# Altium PCB Booster_PA_PREAMP.PcbDoc
Units mm, origin at the board's own origin, x right, y up, seen from the top; angles counter-clockwise.
Board outline 79.75 x 29 mm, 2 copper layers (Top Layer, Bottom Layer), stack 1.071 mm thick; 81 components, 50 nets, 216 pads, 238 vias.
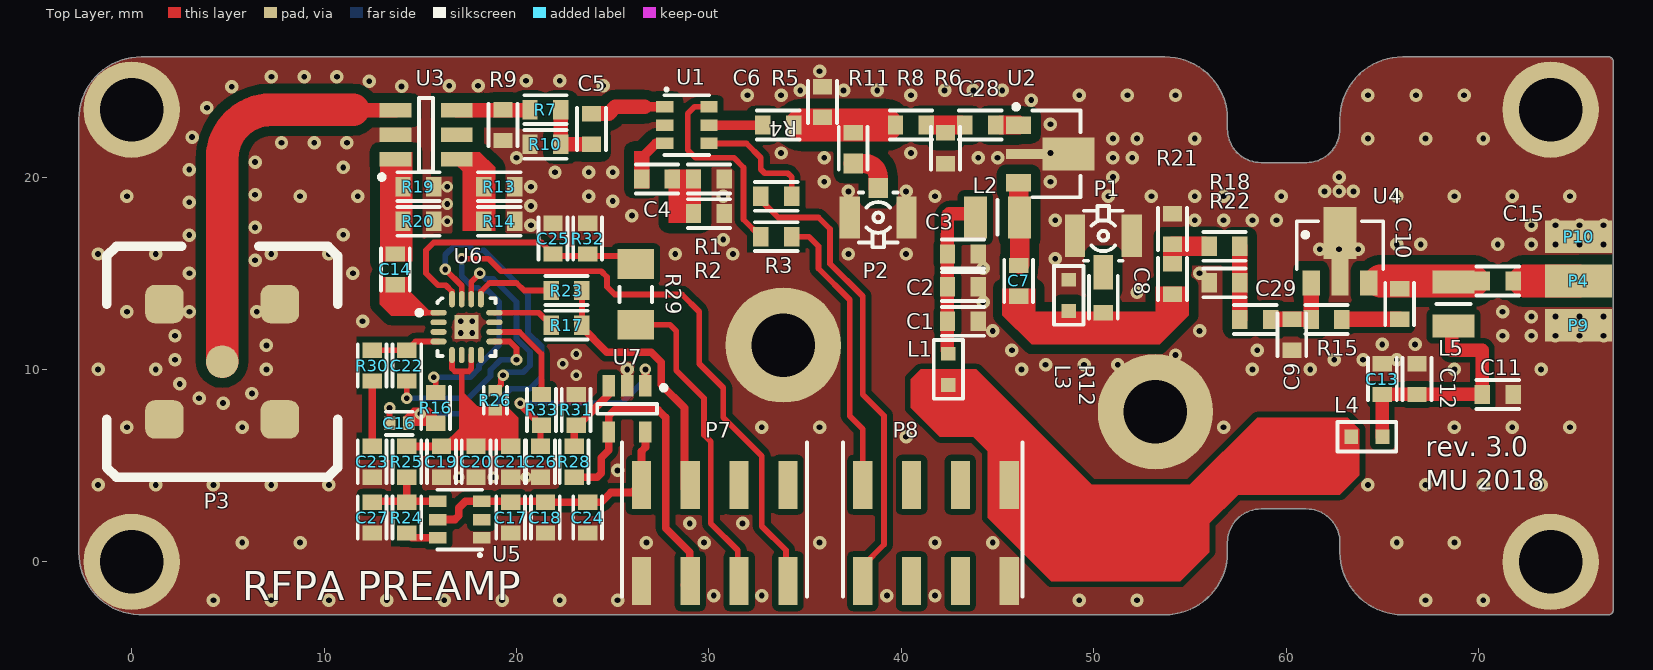
[diagram p0: Top Layer view]
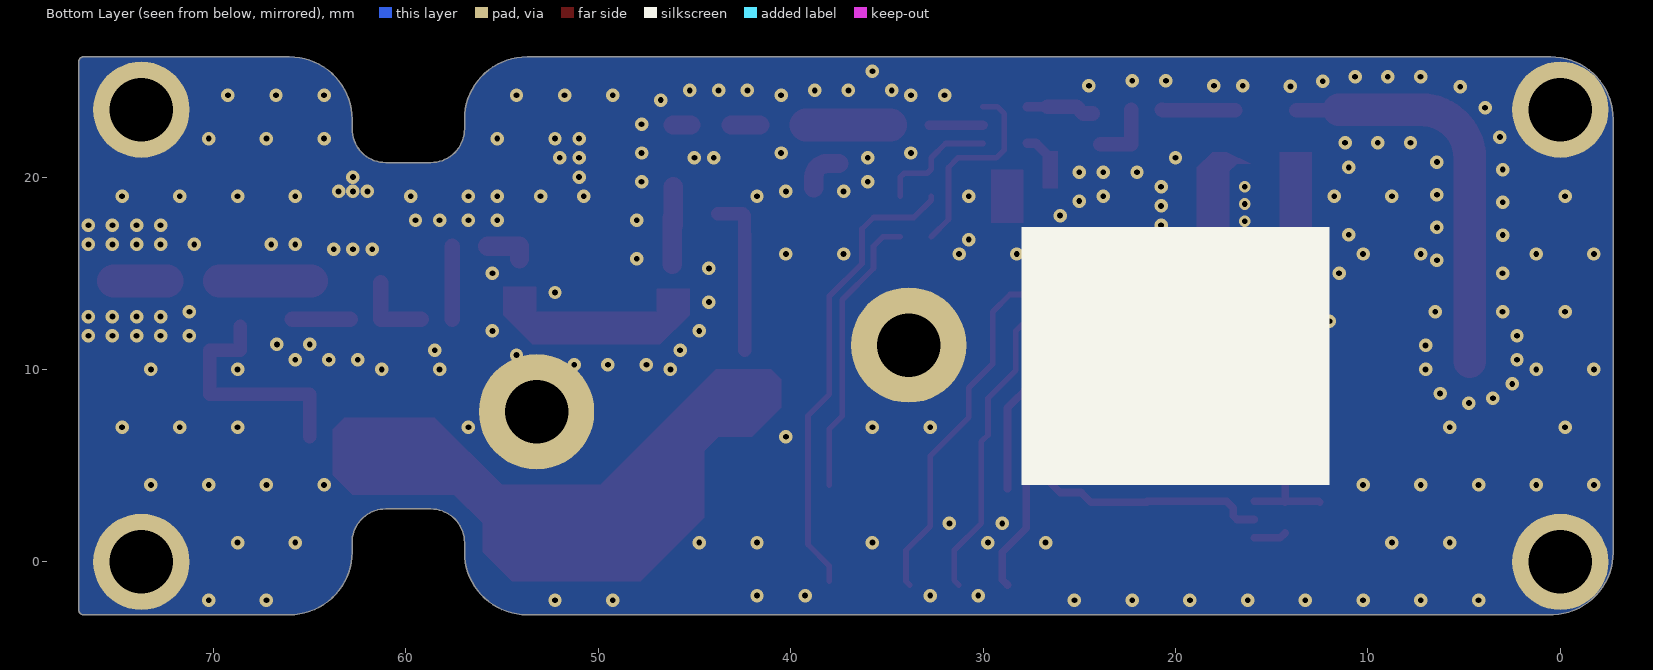
[diagram p1: Bottom Layer view, seen from below]

## Layer stack, top to bottom
Top Solder: solder mask 0.0102, Solder Resist, Dk 3.5
Top Layer: signal copper 0.0356
Dielectric 1: dielectric 1, FR408, Dk 3.67
Bottom Layer: signal copper 0.0356
Bottom Solder: solder mask 0.0102, Solder Resist, Dk 3.5

## Board outline
0.362,-2.747 ccw(c0.4,-2.5) 0.4,-2.75 53.7,-2.75 ccw(c53.7,0.5) 56.95,0.5 56.95,1 ccw(c56.7,1) 56.95,1.001 cw(c58.7,1) 58.7,2.75 61.05,2.75 cw(c61.05,1) 62.8,1 62.8,0.5 cw(c63.05,0.5) 62.8,0.501 62.8,0.5 ccw(c66.05,0.5) 66.05,-2.75 73.75,-2.75 ccw(c73.75,-2.5) 73.751,-2.75 76.75,-2.75 ccw(c76.75,-2.5) 77,-2.5 77,26 ccw(c76.75,26) 76.75,26.25 66.05,26.25 ccw(c66.05,23) 62.8,23 ccw(c63.05,23) 62.8,22.999 62.8,22.5 cw(c61.05,22.5) 61.05,20.75 58.7,20.75 cw(c58.7,22.5) 56.95,22.499 ccw(c56.7,22.5) 56.95,22.5 56.95,23 ccw(c53.7,23) 53.7,26.25 0.5,26.25 ccw(c0.5,23) -2.75,23 -2.75,0.5 ccw(c0.5,0.5)

## Design rules (kind name [scope] priority, off if disabled: settings)
Clearance Clearance_50_Ohm [InNetClass('50_Ohm') vs InNet('GND')] p1: gap=0.5 ignorepadtopadclearanceinfootprint=FALSE
Clearance [All] p2: gap=0.3 ignorepadtopadclearanceinfootprint=FALSE
MinimumSolderMaskSliver [All] p1: minsoldermaskwidth=0.1
PolygonConnect [All] p1: connectstyle=Direct reliefconductorwidth=0.254 reliefentries=4 polygonreliefangle="90 Angle" airgapwidth=0.254
RoomDefinition Booster_PA_PREAMP [InComponentClass('Booster_PA_PREAMP')] p1: confinementstyle=ConfineIn formatcopy=TRUE lockcomponents=FALSE outline -58.75,-41 -7.95,-41 -7.95,-15.6 -58.75,-15.6
RoutingVias [All] p1: holewidth=0.711 width=1.27 viastyle="Through Hole" minholewidth=0.711 minwidth=1.27 maxholewidth=0.711 maxwidth=1.27
SolderMaskExpansion [All] p1: expansion=0.102
Width Width_50_Ohm [InNetClass('50_Ohm')] p1: maxlimit=1.7 minlimit=0.3 preferedwidth=1.7 bottomlayer_minwidth=0 bottomlayer_maxwidth=0 bottomlayer_prefwidth=0 minimp=50.000000 maximp=50.000000 favimp=50.000000
Width [All] p2: maxlimit=2 minlimit=0.2 preferedwidth=0.5 minimp=50.000000 maximp=50.000000 favimp=50.000000
29 further rules are at their usual default settings.

## Classes and differential pairs
net class 50_Ohm: NetC4_1 NetC4_2 NetC5_1 NetC5_2 NetC6_1 NetC6_2 NetC7_1 NetC7_2 NetC8_2 NetC9_1 NetC10_1 NetC14_1 NetC14_2 NetC15_2 NetC28_1 NetC28_2 NetC29_1 NetP1_1 NetP2_1 NetP3_1 NetR7_1 NetR13_2

## Components (designator, comment, footprint, x,y, rotation, side; value= is the part's Value field where it differs from the comment)
C1 "4.7u" 0603_ZE#1 43.2,12.5 r180 top
C2 "100n" 0603_ZE#1 43.2,14.3 r180 top
C3 "680p" 0603_ZE#1 43.2,16 r180 top
C4 "680p" 0603_ZE#1 27.3,19.9 r0 top
C5 "680p" 0603_ZE#1 23.9,22.5 r90 top
C6 "680p" 0603_ZE#1 33.6,22.7 r0 top
C7 "39pF" 0603_ZE#1 46.1,14.6 r270 top
C8 "330pF" 0603_ZE#1 54.1,14.7 r90 top
C9 "dnm" 0603_ZE#1 60.3,11.8 r270 top
C10 "2.2n" 0603_ZE#1 65.9,13.4 r270 top
C11 "680p" 0603_ZE#1 71,8.7 r180 top
C12 "100n" 0603_ZE#1 66.8,9.5 r270 top
C13 "4.7u" 0603_ZE#1 65,9.5 r270 top
C14 "2.2n" 0603_ZE#1 13.7,15.2 r90 top
C15 "680p" 0603_ZE#1 71,14.6 r0 top
C16 "47nF" 0402_ZE 13.9,7.2 r0 top
C17 "100n" 0603_ZE#1 19.7,2.3 r90 top
C18 "4.7u" 0603_ZE#1 21.5,2.3 r90 top
C19 "100p" 0603_ZE#1 16.1,5.2 r90 top
C20 "100n" 0603_ZE#1 17.9,5.2 r90 top
C21 "4.7u" 0603_ZE#1 19.7,5.2 r90 top
C22 "100n" 0603_ZE#1 14.3,10.2 r270 top
C23 "100n" 0603_ZE#1 12.5,5.2 r270 top
C24 "100n" 0603_ZE#1 23.7,2.3 r90 top
C25 "100n" 0603_ZE#1 21.9,16.8 r270 top
C26 "100n" 0603_ZE#1 21.25,5.2 r90 top
C27 "100n" 0603_ZE#1 12.5,2.3 r270 top
C28 "680p" 0603_ZE#1 44.1,22.7 r0 top
C29 "680p" 0603_ZE#1 58.4,12.6 r0 top
L1 "BLM" 0603_IND 42.45,10 r90 top
L2 "1uH 2% 1A" INDC2620X100N 45,17.9 r0 top
L3 "330nH 2%" 0603_IND 48.7,13.85 r270 top
L4 "BLM" 0603_IND 64.2,6.5 r180 top
L5 "1uH 2% 1A" INDC2620X100N 68.7,13.4 r90 top
P1 "U.FL conn" HIROSE_U.FL-R-SMT-1(10) 50.5,16.95 r0 top value=-
P2 "U.FL conn" HIROSE_U.FL-R-SMT-1(10) 38.8,17.9 r180 top value=-
P3 "SMA Conn2" CONSMA002-SMD-G 4.7,10.4 r0 top locked value=-
P4 "PAD" PAD_2x3_rect#1 75.2,14 r90 top value=-
P7 "HDR2X4" HDR2X4_SMD 30.3,1.5 r90 top value="should be fixed with thermal glue"
P8 "HDR2X4" HDR2X4_SMD 41.8,1.5 r90 top value="should be fixed with thermal glue"
P9 "PAD" PAD_2x3_rect#2 75.2,11.1 r90 top value=-
P10 "PAD" PAD_2x3_rect#3 75.2,15.6 r90 top value=-
R1 "100" 0603_ZE#1 30,19.9 r0 top
R2 "100" 0603_ZE#1 30,18.1 r180 top
R3 "100" 0603_ZE#1 33.5,16.9 r0 top
R4 "100" 0603_ZE#1 33.5,19 r180 top
R5 "dnm" 0603_ZE#1 35.9,23.9 r270 top
R6 "dnm" 0603_ZE#1 42.3,21.5 r90 top
R7 "30" 0603_ZE#1 21.5,23.5 r0 top
R8 "0" 0603_ZE#1 40.5,22.7 r0 top
R9 "180" 0603_ZE#1 19.3,22.7 r270 top
R10 "180" 0603_ZE#1 21.5,21.7 r180 top
R11 "dnm" 0603_ZE#2 37.5,21.5 r90 top
R12 "dnm" 0603_ZE#1 50.5,13.75 r270 top
R13 "100" 0603_ZE#1 19.1,19.5 r180 top
R14 "100" 0603_ZE#1 19.1,17.7 r180 top
R15 "1k" 0603_ZE#1 62.1,12.6 r0 top
R16 "0" 0603_ZE#1 15.8,8 r270 top
R17 "0" 0603_ZE#1 22.6,12.3 r0 top
R18 "42" 0603_ZE#1 56.8,16.4 r0 top
R19 "100" 0603_ZE#1 14.9,19.5 r180 top
R20 "100" 0603_ZE#1 14.9,17.7 r180 top
R21 "130" 0603_ZE#1 54.1,17.3 r90 top
R22 "130" 0603_ZE#1 56.8,14.5 r180 top
R23 "dnm" 0603_ZE#1 22.6,14.1 r0 top
R24 "330k" 0603_ZE#1 14.3,2.3 r90 top
R25 "0" 0603_ZE#1 14.3,5.2 r90 top
R26 "4.7k" 0402_ZE 18.9,8.4 r90 top
R28 "10k" 0603_ZE#1 23,5.2 r90 top
R29 "4.7k" chip_r_1206 26.2,13.9 r90 top
R30 "4.02 Ohm, 1%" 0603_ZE#1 12.5,10.2 r90 top
R31 "10k" 0603_ZE#1 23.1,7.9 r90 top
R32 "10k" 0603_ZE#1 23.7,16.8 r90 top
R33 "4.7k" 0603_ZE#1 21.3,7.9 r90 top
U1 "HMC544A" SOT26 27.7,23.65 r270 top value=-
U2 "ADL5535" SOT89#1 48.065,21.2 r0 top value=-
U3 "TCD-9-1WX+" XFMR_MINI-CIRCUITS_DB1627 15.3,22.2 r90 top value=-
U4 "PHA-1+" SOT89#2 62.8,16.465 r90 top value=-
U5 "ADP3300" SOT26 18.2,1.25 r90 top value=-
U6 "ADL5904" QFN50P300X300X80-17N-S125 17.4,12.2 r0 top locked value=-
U7 "LMV321M5X" SOT23-5_N 25.75,7.95 r270 top value=-

## Footprints (in the part's own frame and the unit in brackets; to place one, negate y for a bottom-side part, rotate by r counter-clockwise, add the part's x,y. Pads: shape width x height; smd on the part's side, far side on the other; paste and mask are expansions set on the pad)
0402_ZE [mm]
  rect 0.6x0.7 smd: 1(-0.5,0) 2(0.5,0)
  silkscreen extent -0.7,-0.6 0.7,0.6, body extent -0.5,-0.25 0.5,0.25, height 0.5
0603_IND [mil]
  rect 28x30 smd: 1(-31.89,0.14) 2(31.89,0.14)
  silkscreen extent -60,-30 60,30, body extent -32,-16 32,16, height 32
0603_ZE#1 [mm] "recommended by DESY ZE"
  rect 0.8x1 smd: 1(-0.8,0) 2(0.8,0)
  silkscreen extent -1.1,-0.75 1.1,0.75, body extent -0.8,-0.4 0.8,0.4, height 0.5
0603_ZE#2 [mm] "recommended by DESY ZE"
  rect 1.05x1 smd: 1(-0.8,0)
  rect 0.8x1 smd: 2(0.8,0)
  silkscreen extent -1.1,-0.75 1.1,0.75, body extent -0.8,-0.4 0.8,0.4, height 0.5
chip_r_1206 [mm] "Chip Resistor, 2-Leads, Body 3,2x1,6mm (1206), IPC Low Density"
  rect 1.55x1.9 smd: 1(-1.575,0) 2(1.575,0)
  silkscreen extent -0.4,-0.85 0.4,0.85, body extent -1.6,-0.8 1.6,0.8, height 1
CONSMA002-SMD-G [mm] "CONSMA002-SMD-G"
  rrect50% 2x2 smd: 0(-3,-3) 0(-3,3) 0(3,-3) 0(3,3)
  round 1.7 smd: 1(0,0)
  silkscreen extent -6,-6 6,6, body extent -3.5,-3.5 11.6,3.5, height 10.86
HDR2X4_SMD [mm]
  rect 2.5x1 smd: 1(-2.5,-3.81) 2(2.5,-3.81) 3(-2.5,-1.27) 4(2.5,-1.27) 5(-2.5,1.27) 6(2.5,1.27) 7(-2.5,3.81) 8(2.5,3.81)
  silkscreen extent -3.3,-4.79 4.7,4.83, body extent -3.65,-5.08 3.65,5.08, height 9.3
HIROSE_U.FL-R-SMT-1(10) [mm] "Up to 6GHz Ultra Small Surface Mount Male Coaxial Connectors U.FL Series"
  rect 1x1.05 smd: 1(0,-1.525)
  rect 1.05x2.2 smd: 2(-1.475,0) 2(1.475,0)
  silkscreen extent -1,-1.3 1,1.55, body extent -1.5,-1.55 1.5,1.55, height 1.25
INDC2620X100N [mm] "Chip Inductor, EIA 1008, Metric 2520, Body 2.60mm L X 2.00mm W X 1.00mm H, IPC Medium Density"
  rect 1.2x2.2 smd: 1(-1.15,0) 2(1.15,0)
  silkscreen extent 0,-0.9 0,0.9, body extent -1.3,-1 1.3,1, height 1
PAD_2x3_rect#1 [mm] "pad pod gniazdka SMA wkrêcane w obudowy"
  rect 1.7x3.5 smd mask+0.03: 1(0.6,0)
PAD_2x3_rect#2 [mm] "pad pod gniazdka SMA wkrêcane w obudowy"
  rect 1.7x3.5 smd mask+0.03: 1(1.2,0)
PAD_2x3_rect#3 [mm] "pad pod gniazdka SMA wkrêcane w obudowy"
  rect 1.7x3.5 smd mask+0.03: 1(1.3,0)
QFN50P300X300X80-17N-S125 [mm] "QFN, 0.50mm pitch, square; 4 pin X 4 pin, 3mm X 3mm X 0.80mm H body (w/thermal tab 1.25 X 1.25mm),  IPC Medium Density"
  oval 0.85x0.3 smd mask+0.05: 1(-1.45,0.75) 2(-1.45,0.25) 3(-1.45,-0.25) 4(-1.45,-0.75) 9(1.45,-0.75) 10(1.45,-0.25) 11(1.45,0.25) 12(1.45,0.75)
  oval 0.3x0.85 smd mask+0.05: 5(-0.75,-1.45) 6(-0.25,-1.45) 7(0.25,-1.45) 8(0.75,-1.45) 13(0.75,1.45) 14(0.25,1.45) 15(-0.25,1.45) 16(-0.75,1.45)
  rect 1.25x1.25 smd mask+0.05: 17(0,0)
  silkscreen extent -2.57,-1.5 1.5,1.5, body extent -1.57,-1.57 1.58,1.58, height 0.8
SOT23-5_N [mm] "SOT23, 5-Leads, Body 2.9x1.6mm, Pitch 0.95mm, Lead Span 2.8mm, IPC Medium Density"
  rect 1.1x0.65 smd: 1(-1.2,0.95) 2(-1.2,0) 3(-1.2,-0.95) 4(1.2,-0.95) 5(1.2,0.95)
  silkscreen extent -1.22,-1.55 0.25,2.02, body extent -1.63,-1.5 1.57,1.5, height 1.1
SOT26 [mm]
  rect 0.6x0.9 smd mask+0.09: 1(0,0) 2(0.95,0) 3(1.9,0) 4(1.9,2.3) 5(0.95,2.3) 6(0,2.3)
  silkscreen extent -0.95,0 2.5,2.3, body extent -0.55,-0.35 2.45,2.65, height 1.5
SOT89#1 [mm] "SOT89-3, 3-Leads, Body 2.48x4.5mm"
  rect 1.3x0.9 smd: 1(-1.965,1.5) 3(-1.965,-1.5)
  rect 1.9x0.5 smd: 2(-1.665,0)
  rect 2.7x1.7 smd: 2(0.635,0)
  silkscreen extent -2.22,-2.25 1.24,2.57, body extent -2.44,-2.25 1.81,2.25, height 1.6
SOT89#2 [mm] "SOT89-3, 3-Leads, Body 2.48x4.5mm"
  rect 1.3x0.9 smd: 1(-1.965,1.5) 3(-1.965,-1.5)
  rect 1.9x0.9 smd: 2(-1.665,0)
  rect 2.7x1.7 smd: 2(0.635,0)
  silkscreen extent -1.24,-2.25 1.24,2.25, body extent -2.44,-2.25 1.81,2.25, height 1.6
XFMR_MINI-CIRCUITS_DB1627 [mm] "MINI-CIRCUITS RF Transformer, Case DB1627 - Body 4.06X3.81mm"
  rect 0.76x1.65 smd: 1(-1.27,1.59) 2(0,1.59) 3(1.27,1.59) 4(1.27,-1.59) 5(0,-1.59) 6(-1.27,-1.59)
  silkscreen extent -2.32,-0.37 1.91,2.42, body extent -1.9,-2.03 1.91,2.03, height 4.06

## Part data
C1 C13 C18 C21: library part C, "Capacitor", Manufacturer=Murata, Manufacturer Part Number=GRM188R61C475KAAJD, Package=0603, Supplier Part Number 1=2611924RL, Generic=yes, Mounting type=SMT, Remarks="Tolerance 10%", Supplier 1=Farnell, Supplier 2=Mouser, Supplier 3=Digikey, Supplier Part Number 2=81-GRM188R61C475KAJD, Supplier Part Number 3=490-10481-1-ND
C2 C12 C17 C19 C20 C22 C23 C24 C25 C26 C27: library part C, "Capacitor", Manufacturer=Multicomp, Manufacturer Part Number=MC0603B104K160CT, Package=0603, Supplier Part Number 1=1759016RL, Generic=yes, Mounting type=SMT, Remarks="Tolerance 10%", Supplier 1=Farnell, Supplier 2=-, Supplier 3=-, Supplier Part Number 2=-, Supplier Part Number 3=-
C3 C4 C5 C6 C11 C15 C28 C29: library part C, "Capacitor", Manufacturer=Multicomp, Manufacturer Part Number=MCMT18N681F500CT, Package=0603, Supplier Part Number 1=1856154RL, Generic=yes, Mounting type=SMT, Remarks="Tolerance 1%", Supplier 1=Farnell, Supplier 2=-, Supplier 3=-, Supplier Part Number 2=-, Supplier Part Number 3=-
C7: library part C, "Capacitor", Manufacturer=AVX, Manufacturer Part Number=06031A390FAT2A, Package=0603, Supplier Part Number 1=2332564RL, Generic=yes, Mounting type=SMT, Remarks="Tolerance 1%", Supplier 1=Farnell, Supplier 2=Mouser, Supplier 3=Digikey, Supplier Part Number 2=581-06031A390FAT2A, Supplier Part Number 3=478-5773-1-ND
C8: library part C, "Capacitor", Manufacturer=AVX, Manufacturer Part Number=06035A331FAT2A, Package=0603, Supplier Part Number 1=2332616RL, Generic=yes, Mounting type=SMT, Remarks="Tolerance 1%", Supplier 1=Farnell, Supplier 2=Mouser, Supplier 3=Digikey, Supplier Part Number 2=581-06035A331FAT2A, Supplier Part Number 3=478-6031-1-ND
C9: library part C, "Capacitor", Manufacturer=-, Package=0603, Generic=yes, Manufacturer Part Number=-, Mounting type=SMT, Remarks=-, Supplier 1=-, Supplier 2=-, Supplier 3=-, Supplier Part Number 1=-, Supplier Part Number 2=-, Supplier Part Number 3=-
C10 C14: library part C, "Capacitor", Manufacturer=Murata, Manufacturer Part Number=GRM155R61H104KE19D, Package=0402, Supplier Part Number 1=81-GRM155R61H104KE9D, Generic=yes, Mounting type=SMT, Remarks=-, Supplier 1=Mouser, Supplier 2="Digi Key", Supplier 3=Farnell, Supplier Part Number 2=490-11917-1-ND, Supplier Part Number 3=2218856
C16 R26: library part R2, "Resistor", Manufacturer=-, Package=0402, Generic=yes, Manufacturer Part Number=-, Mounting type=SMT, Supplier 1=-, Supplier 2=-, Supplier 3=-, Supplier Part Number 1=-, Supplier Part Number 2=-, Supplier Part Number 3=-
  C16: Remarks=-
  R26: Remarks="Tolerance 1%"
L1 L4: library part Inductor, Manufacturer=Murata, Manufacturer Part Number=BLM18HE102SN1D, Package=0603, Supplier Part Number 1=2443236, Generic=no, Mounting type=SMT, Remarks=-, Supplier 1=Farnell, Supplier 2=Mouser, Supplier 3=Digikey, Supplier Part Number 2=81-BLM18HE102SN1D, Supplier Part Number 3=490-5215-1-ND
L2 L5: library part Inductor, Manufacturer=ABRACON, Manufacturer Part Number=AISC-1008-1R0G-T, Package=1008, Supplier Part Number 1=815-AISC10081R0GT, Generic=no, Mounting type=SMT, Remarks="Tolerance 2%", Supplier 1=Mouser, Supplier 2=-, Supplier 3=-, Supplier Part Number 2=-, Supplier Part Number 3=-
L3: library part Inductor, Manufacturer=Coilcraft, Manufacturer Part Number=0603LS-331XGLB, Package=0603, Supplier Part Number 1=2286254, Generic=no, Mounting type=SMT, Remarks="Tolerance 2%", Supplier 1=Farnell, Supplier 2=Mouser, Supplier 3=-, Supplier Part Number 2=994-0603LS-331XGLB, Supplier Part Number 3=-
P1 P2: library part "U.FL socket", "Hiroso U.FL series RF connector fmax 6GHz", Manufacturer=Hirose, Manufacturer Part Number=U.FL-R-SMT(01), Package="u.FL SMD", Supplier Part Number 1=1688077, Generic=yes, Mounting type=SMT, Remarks="Can be replaced with any u.FL connector", Supplier 1=Farnell, Supplier 2=Mouser, Supplier 3=Digikey, Supplier Part Number 2=798-U.FL-R-SMT-110, Supplier Part Number 3=H11891CT-ND
P3: "SMA Connector 142-0711-301", Manufacturer="Linx Technologies", Manufacturer Part Number=CONSMA002-SMD-G, Package="SMA SMD angled", Supplier Part Number 1=712-CONSMA002-SMD-G, Generic=no, Mounting type=SMT, Remarks="Can be replaced with Multicomp 19-49-2-TGG", Supplier 1=Mouser, Supplier 2=Farnell, Supplier 3=-, Supplier Part Number 2=1169635, Supplier Part Number 3=-
P4 P9 P10: Manufacturer=-, Generic=no, Manufacturer Part Number=-, Mounting type=-, Package=-, Remarks="PCB PAD", Supplier 1=-, Supplier 2=-, Supplier 3=-, Supplier Part Number 1=-, Supplier Part Number 2=-, Supplier Part Number 3=-
P7 P8: "Header, 4-Pin, Dual Row", Manufacturer=-, Package="2x4 pin SMD", Supplier Part Number 1=ZL264-8DG, Generic=yes, Manufacturer Part Number=-, Mounting type=SMT, Remarks="ordinary goldpin socket", Supplier 1=TME, Supplier 2=-, Supplier 3=-, Supplier Part Number 2=-, Supplier Part Number 3=-
R1 R2 R3 R4 R5 R6 R7 R8 R9 R10 R11 R12 R13 R14 R15 R16 R17 R18 R19 R20 R21 R22 R23 R24 R25 R28 R30 R31 R32 R33: library part R2, "Resistor", Manufacturer=-, Package=0603, Generic=yes, Manufacturer Part Number=-, Mounting type=SMT, Supplier 1=-, Supplier 2=-, Supplier 3=-, Supplier Part Number 1=-, Supplier Part Number 2=-, Supplier Part Number 3=-
  R1 R2 R3 R4 R7 R9 R10 R13 R14 R15 R18 R19 R20 R21 R22 R24 R28 R31 R32 R33: Remarks="Tolerance 1%"
  R5 R6 R11 R12: Remarks=-
  R8 R16 R17 R23 R25: Remarks="Debug resitor, to be placed in release version"
  R30: Remarks="Value must be 4.02 Ohm, 1%"
R29: library part R2, "Resistor", Manufacturer=-, Package=1206, Generic=yes, Manufacturer Part Number=-, Mounting type=SMT, Remarks="Tolerance 1%", Supplier 1=-, Supplier 2=-, Supplier 3=-, Supplier Part Number 1=-, Supplier Part Number 2=-, Supplier Part Number 3=-
U1: library part HMC544, "GaAs MMIC T/R SWITCH,  DC - 4 GHz", Manufacturer="Analog Devices", Package=SOT26, Supplier Part Number 1=2501065, Generic=no, Manufacturer Part Number=HMC544A, Mounting type=SMT, Remarks=-, Supplier 1=Farnell, Supplier 2=Mouser, Supplier 3=Digikey, Supplier Part Number 2=584-HMC544AE, Supplier Part Number 3=1127-1856-1-ND
U2: library part HMC639ST89, "High IP3, Low Noise RF Amplifier, 0.2-4.0 GHz", Manufacturer="Analog Devices", Manufacturer Part Number=ADL5536ARKZ-R7, Package=SOT89, Supplier Part Number 1=2377138, Gain="16.3 @ 200 MHz", Generic=no, IP3=38dBm, Mounting type=SMT, NF=1.8dB, P1dB=22dBm, Remarks=-, Supplier 1=Farnell, Supplier 2=Mouser, Supplier 3=Digikey, Supplier Part Number 2=584-ADL5536ARKZ-R7, Supplier Part Number 3=ADL5536ARKZ-R7CT-ND
U3: library part TCD-20-4X+, "SMD Directional Coupler, 9dB", Manufacturer="Mini Circuits", Package=DB1627, Generic=no, Manufacturer Part Number=TCD-9-1WX+, Mounting type=SMT, Remarks=-, Supplier 1=Municom, Supplier 2=-, Supplier 3=-, Supplier Part Number 1=TCD-9-1WX+, Supplier Part Number 2=-, Supplier Part Number 3=-
U4: library part HMC639ST89, "High IP3, Low Noise RF Amplifier, 0.2-4.0 GHz", Manufacturer=MiniCircuits, Package=SOT89, Gain="16.3 @ 200 MHz", Generic=no, IP3=38dBm, Manufacturer Part Number=PHA-1+, Mounting type=SMT, NF=1.8dB, P1dB=22dBm, Remarks=-, Supplier 1=Municom, Supplier 2=-, Supplier 3=-, Supplier Part Number 1=PHA-1+, Supplier Part Number 2=-, Supplier Part Number 3=-
U5: "High Accuracy anyCAP®  50 mA Low Dropout Linear Regulator", Manufacturer="Analog Devices", Manufacturer Part Number=ADP3300ARTZ-3.3RL7, Output current max.=50mA, Output voltage=3.3V, Package=SOT-23-6, Supplier Part Number 1=1661067RL, Generic=no, Mounting type=SMT, Remarks=-, Supplier 1=Farnell, Supplier 2=Mouser, Supplier 3=Digikey, Supplier Part Number 2=584-ADP3300ARTZ3.3R7, Supplier Part Number 3=ADP3300ARTZ3.3RCT-ND
U6: "DC to 6 GHz 45dB TruPwr Detector with Envelope Threshold Detection", Manufacturer="Analog Devices", Manufacturer Part Number=ADL5904ACPZN-R7, Package=QFN-16, Supplier Part Number 1=584-ADL5904ACPZN-R7, Generic=no, Mounting type=SMT, Remarks=-, Supplier 1=Mouser, Supplier 2=Digikey, Supplier 3=-, Supplier Part Number 2=ADL5904ACPZN-R7CT-ND, Supplier Part Number 3=-
U7: "Single General Purpose Low voltage Rail to Rail Output Op amp", Manufacturer=TI, Package=SOT-23-6, Supplier Part Number 1=2764711, Generic=no, Manufacturer Part Number=LMV321M5X, Mounting type=SMT, Remarks=-, Supplier 1=Farnell, Supplier 2=Mouser, Supplier 3=Digikey, Supplier Part Number 2=926-LMV321M5X/NOPB, Supplier Part Number 3=LMV321M5X/NOPBCT-ND

## Free pads (board coordinates)
  round 5 hole 3.3: 0(0,0) 1(0,23.5) 2(73.75,0) 3(73.75,23.5)
  round 6 hole 3.3: 4(33.87,11.27) 5(53.21,7.8)

## Via types
v1: diameter 0.7, hole 0.3, Top Layer to Bottom Layer, tented both sides, 214 vias
v2: diameter 0.6, hole 0.3, Top Layer to Bottom Layer, tented both sides, 24 vias

## Nets (pads, with @x,y where several pads share a name; then routed paths per layer and width w, separated by ;. In a path a pad name is that pad's centre, name@x,y a point inside that pad or via, vN(x,y) a via of type N, cw(c..) or ccw(c..) an arc to the next point about the centre after c; other vN are vias at no path point)
5V_PREAMP: L1.1 L4.2 P8.2 | length 30
  Top Layer w0.7: L1.1@42.396,9.49 42.396,8.604 43.3,7.7 44.7,7.7 45.31,7.09 45.31,1.99 45.9,1.4 53.2,1.4 58.296,6.496 L4.2
ADL_Q: P7.6 R17.2 R23.2 | length 13.8
  Top Layer w0.3: R17.2 R23.2
  Top Layer w0.4: R17.2@23.35,12.25 24.7,10.9 27,10.9 27.525,10.375 27.525,9.205 28.73,8 P7.6@28.73,3.8
ADL_RST: P7.1 R16.1 | length 40.8
  Top Layer w0.3: v2(15.7,9.6) 15.8,9.7 R16.1 ; v2(17.15,15.75) 18.55,15.75 19.2,15.1 24.4,15.1 24.7,14.8 24.7,14.3 25.1,13.9 28.6,13.9 29.5,13 29.5,10.3 30.75,9.05 30.75,7.5 32.75,5.5 32.75,1.85 34,0.6 34,-1.01 P7.1@33.81,-1.2
  Bottom Layer w0.3: v2(15.7,9.6) 17.6,9.6 18.05,10.05 18.05,10.218 19.1,11.268 19.1,13.5 18.5,14.1 18.151,14.1 18.004,14.248 17.748,14.248 17.15,14.845 v2(17.15,15.75)
ADL_VREF: P7.3 R29.1 | length 16.9
  Top Layer w0.3: R29.1 27.975,12.325 28.3,12 28.3,9.95 29.75,8.5 29.75,6.6 30.1,6.25 30.1,2 31.5,0.6 31.5,-0.97 P7.3@31.27,-1.2
GND: C1.1 C2.1 C3.1 C9.2 C11.1 C12.1 C13.1 C16.1 C17.1 C18.1 C19.1 C20.1 C21.1 C23.2 C24.1 C25.1 C26.1 C27.2 L3.1 P1.2 P2.2 P3.0 P7.7 P8.1 P9.1 P10.1 pad.0 pad.1 pad.2 pad.3 pad.4 pad.5 R1.2 R2.1 R5.1 R6.1 R9.2 R10.2 R13.1 R14.1 R19.1 R20.1 R21.2 R22.2 R31.2 R32.2 U1.2 U2.2 U3.2 U4.2 U5.1 U6.11 U6.17 U7.2 | length 0.8
  Top Layer w0.3: C16.1 v2(13.4,8)
  other v1: 4.25,-2 7.25,-2 10.25,-2 13.25,-2 16.25,-2 19.25,-2 22.25,-2 25.25,-2 49.25,-2 52.25,-2 67.25,-2 70.25,-2 30.25,-1.75 32.75,-1.75 39.25,-1.75 41.75,-1.75 5.75,1 8.75,1 26.75,1 29.75,1 35.75,1 41.75,1 44.75,1 65.75,1 68.75,1 29,2 31.75,2 -1.75,4 1.25,4 4.25,4 7.25,4 10.25,4 64.25,4 67.25,4 70.25,4 73.25,4 25.25,4.75 40.25,6.5 -0.25,7 5.75,7 32.75,7 35.75,7 56.75,7 68.75,7 71.75,7 74.75,7 4.75,8.25 3.5,8.5 6.25,8.75 2.5,9.25 -1.75,10 1.25,10 7,10 25.75,10 46.25,10 58.25,10 61.25,10 68.75,10 73.25,10 47.5,10.25 49.5,10.25 51.25,10.25 2.25,10.5 62.5,10.5 64,10.5 65.75,10.5 54.25,10.75 45.75,11 58.5,11 7,11.25 65,11.3 66.7,11.3 2.25,11.75 71.25,11.75 72.75,11.75 74,11.75 75.25,11.75 76.5,11.75 44.75,12 55.5,12 12,12.5 72.75,12.75 74,12.75 75.25,12.75 76.5,12.75 -0.25,13 3,13 6.5,13 71.25,13 44.25,13.5 52.25,14 3,15 11.5,15 55.5,15 44.25,15.25 6.415,15.68 48,15.75 -1.75,16 1.25,16 7.25,16 10.25,16 28.25,16 31.25,16 37.25,16 40.25,16 61.75,16.25 62.75,16.25 63.75,16.25 65.75,16.5 67,16.5 71,16.5 72.75,16.5 74,16.5 75.25,16.5 76.5,16.5 30.75,16.75 2.985,16.986 11,17 6.415,17.38 20.75,17.5 72.75,17.5 74,17.5 75.25,17.5 76.5,17.5 48,17.75 55.25,17.75 56.75,17.75 58.25,17.75 59.5,17.75 26,18 20.75,18.5 2.985,18.686 25,18.75 -0.25,19 8.75,19 11.75,19 23.75,19 30.75,19 41.75,19 50.75,19 53,19 55.25,19 56.75,19 59.75,19 65.75,19 68.75,19 71.75,19 74.75,19 6.415,19.08 37.25,19.25 40.25,19.25 62,19.25 62.75,19.25 63.5,19.25 20.75,19.5 36,19.75 47.75,19.75 51,20 62.75,20 22,20.25 23.75,20.25 25,20.25 2.985,20.386 11,20.5 6.415,20.78 20,21 36,21 44,21 45,21 51,21 52,21 33.75,21.25 40.5,21.25 47.75,21.25 7.786,21.785 9.486,21.785 11.186,21.785 51,22 52.25,22 55.25,22 64.25,22 67.25,22 70.25,22 3.141,22.079 47.75,22.75 3.907,23.597 46.75,24 32,24.25 33.75,24.25 40.5,24.25 49.25,24.25 51.75,24.25 54.25,24.25 64.25,24.25 66.75,24.25 69.25,24.25 34.75,24.5 37,24.5 38.75,24.5 42.25,24.5 43.75,24.5 45.25,24.5 5.205,24.694 14.026,24.707 16.5,24.75 18,24.75 24.5,24.75 12.348,24.982 20.5,25 22.25,25 7.264,25.215 8.964,25.215 10.664,25.215 35.75,25.5
  other v2: 17,4.4 18.8,4.4 20.5,4.4 23.1,9.7 22.4,10.3 23.1,10.8 17.1,11.9 17.7,11.9 17.1,12.5 17.7,12.5 16.4,17.7 16.4,18.6 16.4,19.5
NetC1_2: C1.2 C2.2 C3.2 L1.2 L2.1 | length 8.4
  Top Layer w0.7: L1.2@42.396,11 42.396,16.996 42.4,17 42.4,18 42.5,18.1 L2.1@43.8,18.1
NetC4_1: C4.1 U1.3 | length 1.4
  Top Layer w0.5: 26.6,21.1 27.25,21.75 U1.3
NetC4_2: C4.2 R1.1 R2.2
NetC5_1: C5.1 R7.2 R10.1 | length 3.4
  Top Layer w0.76: R7.2 R10.1 C5.1
NetC5_2: C5.2 U1.1 | length 3.5
  Top Layer w0.5: 26.65,23.65 U1.1
  Top Layer w0.76: C5.2@24.3,23.3 24.789,23.3 25.139,23.65 26.65,23.65
NetC6_1: C6.1 U1.5 | length 2.9
  Top Layer w0.3: C6.1@32.75,22.65 C6.1
  Top Layer w0.5: U1.5 C6.1
NetC6_2: C6.2 R5.2 R8.1 R11.2 | length 4.4
  Top Layer w1.7: 34.8,22.7 39.2,22.7
NetC7_1: C7.1 L2.2 U2.3 | length 4.4
  Top Layer w1: L2.2@46.1,17.5 U2.3@46.1,19.5 ; C7.1@46.15,15.45 L2.2
NetC7_2: C7.2 C8.1 L3.2 R12.2
NetC8_2: C8.2 R18.1 R21.1 | length 2.3
  Top Layer w1: C8.2@54.1,15.75 54.1,16.4 R18.1@55.75,16.4
NetC9_1: C9.1 C29.2 R15.1 U4.1 | length 4
  Top Layer w0.8: C29.2 C9.1 R15.1 U4.1
NetC10_1: C10.1 C15.1 L5.2 U4.3 | length 4.8
  Top Layer w1.7: 64.9,14.6 L5.2@69.7,14.6
NetC10_2: C10.2 R15.2 | length 3
  Top Layer w0.8: R15.2 C10.2
NetC11_2: C11.2 C12.2 C13.2 L4.1 L5.1 | length 12.6
  Top Layer w0.7: L4.1 65,6.506 C13.2 C12.2 C11.2 70.2,11 68.6,11 L5.1@68.6,12.25
NetC14_1: C14.1 U6.1 | length 1.1
  Top Layer w0.3: 14.85,12.95 U6.1
NetC14_2: C14.2 R19.2 R20.2 U3.1
NetC15_2: C15.2 P4.1 | length 2.8
  Top Layer w1.7: 72.4,14.6 P4.1
NetC16_2: C16.2 R16.2 U6.15 | length 21.8
  Top Layer w0.3: C16.2 15,7.2 ; v2(15,7.7) 15,7.2 ; R16.2 15,7.2 ; v2(16.3,15.2) 17.15,14.35 U6.15
  Bottom Layer w0.3: v2(15,7.7) 18.4,7.7 19.7,9 20.7,9 21.3,9.6 21.3,11.2 20.6,11.9 20.6,13.9 18.3,16.2 17.761,16.2 17.461,16.5 16.839,16.5 16.3,15.961 v2(16.3,15.2)
NetC19_2: C19.2 C20.2 C21.2 R25.2 R26.1 U6.5 U6.7 | length 13.9
  Top Layer w0.3: U6.5 16.65,10.05 16.8,9.9 17.15,9.9 ; 17.2,6 17.15,6.05 17.15,9.9 ; U6.7 17.65,10.05 17.5,9.9 17.15,9.9 ; 18.8,6 18.8,6.8 19.2,7.2 R26.1@19.2,7.9
  Top Layer w0.4: R25.2 C19.2 17.2,6 C20.2 18.8,6 C21.2
NetC22_1: C22.1 R30.2 U6.4 | length 3.6
  Top Layer w0.3: R30.2 C22.1 14.75,11.45 U6.4
NetC22_2: C22.2 U6.9 | length 9.5
  Top Layer w0.3: v2(14.3,8.5) C22.2 ; U6.9 19.65,11.45 20,11.1 v2(20,10.5)
  Bottom Layer w0.3: v2(14.3,8.5) 17.5,8.5 18.65,9.65 18.65,9.969 19.181,10.5 v2(20,10.5)
NetC23_1: C23.1 R30.1 | length 3.4
  Top Layer w0.4: C23.1 R30.1
NetC25_2: C25.2 R29.2 R32.1 U6.16 | length 14.7
  Top Layer w0.3: U6.16 16.65,14.05 16.325,14.375 15.925,14.375 15.3,15 15.3,16.2 15.7,16.6 21.3,16.6 C25.2 ; C25.2@21.9,15.9 26.175,15.9 R29.2@26.2,15.875
NetC26_2: C26.2 R33.1 U7.1 | length 11.2
  Top Layer w0.3: C26.2 21.25,7.05 R33.1
  Top Layer w0.4: v2@20.1,8.3 v2@20.151,8.249 ; v2(20.2,8.249) v2@20.151,8.249 ; R33.1 21.293,7.1 20.3,8.093 20.3,8.1 v2@20.151,8.249 ; U7.1 v2(26.7,10)
  Bottom Layer w0.3: v2(20.2,8.249) 25.458,8.249 26.7,9.49 v2(26.7,10)
NetC28_1: C28.1 R6.2 R8.2 | length 1.5
  Top Layer w1: R8.2@41.6,22.7 C28.1@43.1,22.7
NetC28_2: C28.2 U2.1 | length 0.9
  Top Layer w1: C28.2@45.2,22.7 U2.1
NetC29_1: C29.1 R18.2 R22.1 | length 3.8
  Top Layer w0.8: C29.1 R18.2
NetP1_1: P1.1 R12.1
NetP2_1: P2.1 R11.1 | length 2.1
  Top Layer w1: R11.1 38.1,20.7 cw(c38.1,20) 38.8,20 ; P2.1 P2.1@38.8,19.8
NetP3_1: P3.1 U3.3 | length 21
  Top Layer w0.76: 11.5,23.5 ccw(c11.53,23.5) 11.53,23.47 U3.3
  Top Layer w1.7: P3.1 4.7,20.96 cw(c7.24,20.96) 7.24,23.5 11.5,23.5
NetP7_5: P7.5 R28.1 U7.4 | length 17.2
  Top Layer w0.4: R28.1 24.2,4.4 24.4,4.6 24.4,5.4 24.8,5.8 U7.4 24.8,7.6 25.1,7.9 27.35,7.9 27.75,7.5 27.75,1.75 29,0.5 29,-0.93 P7.5@28.73,-1.2
NetR3_1: R3.1 U1.6 | length 10.4
  Top Layer w0.3: U1.6 29.25,23.65 28.9,23.3 28.9,21.4 29.3,21 31.3,21 31.8,20.5 31.8,17.8 R3.1
NetR4_1: R4.1 U1.4 | length 6.4
  Top Layer w0.3: U1.4 31.95,21.75 32.7,21 32.7,20.4 32.9,20.2 34.1,20.2 34.3,20 R4.1
NetR7_1: R7.1 R9.1 U3.4 | length 3.8
  Top Layer w0.76: U3.4 20.67,23.47 R7.1
NetR13_2: R13.2 R14.2 U3.6
NetR17_1: R17.1 U6.12 | length 3.2
  Top Layer w0.3: U6.12 21.15,12.95 R17.1
NetR23_1: R23.1 U6.13 | length 4.4
  Top Layer w0.3: U6.13 18.15,14.05 18.6,14.5 20,14.5 20.4,14.1 R23.1
NetR24_1: R24.1 U5.6 | length 1.7
  Top Layer w0.4: R24.1 14.55,1.25 U5.6
NetR26_2: R26.2 U6.14 | length 10.2
  Top Layer w0.3: U6.14 17.65,14.55 v2(18.1,15) ; R26.2 19.2,9.2 19.2,9.6 v2(19.3,9.7)
  Bottom Layer w0.3: v2(18.1,15) 18.4,14.7 18.8,14.7 20,13.5 20,11.6 20.7,10.9 20.7,10.2 20.35,9.85 19.45,9.85 v2(19.3,9.7)
NetR28_2: R28.2 R31.1 U7.3 | length 4
  Top Layer w0.4: R28.2 23,7 R31.1 23.2,7.1 24.8,8.7 U7.3
NetR33_2: R33.2 U6.10 | length 5.1
  Top Layer w0.3: U6.10 20.15,11.95 21.3,10.8 R33.2 R33.2@21.25,8.75
P3V3A: C27.1 R24.2 R25.1 U5.4 | length 4.7
  Top Layer w0.4: C27.1 12.55,3.15 14.3,3.15 R25.1 ; R24.2 14.35,3.15 U5.4
P5V0A1: C17.2 C18.2 C24.2 P7.8 U5.3 U5.5 U7.5 | length 14.5
  Top Layer w0.4: U5.5 16.8,2.2 17,2.4 17,2.8 17.35,3.15 U5.3 21.45,3.15 C18.2 C24.2 24.4,3.1 24.9,3.6 25.99,3.6 26.5,4.11 26.5,5.75 26.7,5.95 U7.5 U7.5@26.75,6.7
SW_RF_A: P8.8 R3.2 | length 15
  Top Layer w0.3: R3.2 35.2,16.9 35.7,16.4 35.7,15.241 37.32,13.621 37.32,7.58 37.99,6.91 P8.8
SW_RF_B: P8.7 R4.2 | length 24.3
  Top Layer w0.3: R4.2 32.7,18.8 33.6,17.9 35.7,17.9 36.3,17.3 36.3,15.49 37.99,13.8 37.99,8.7 39.1,7.59 39.1,0.9 37.99,-0.21 P8.7
pads on no net: P7.2 P7.4 P8.3 P8.4 P8.5 P8.6 U3.5 U5.2 U6.2 U6.3 U6.6 U6.8

## Polygon pours and split planes (outlines as drawn)
GND on Bottom Layer "BOTTOM_GND_POLY" (solid, remove dead copper, pour order 5): 0.362,-2.747 ccw(c0.4,-2.5) 0.4,-2.75 53.7,-2.75 ccw(c53.7,0.5) 56.95,0.5 56.95,1 ccw(c56.7,1) 56.95,1.001 cw(c58.7,1) 58.7,2.75 61.05,2.75 cw(c61.05,1) 62.8,1 62.8,0.5 cw(c63.05,0.5) 62.8,0.501 62.8,0.5 ccw(c66.05,0.5) 66.05,-2.75 73.75,-2.75 ccw(c73.75,-2.5) 73.751,-2.75 76.75,-2.75 ccw(c76.75,-2.5) 77,-2.5 77,26 ccw(c76.75,26) 76.75,26.25 66.05,26.25 ccw(c66.05,23) 62.8,23 ccw(c63.05,23) 62.8,22.999 62.8,22.5 cw(c61.05,22.5) 61.05,20.75 58.7,20.75 cw(c58.7,22.5) 56.95,22.499 ccw(c56.7,22.5) 56.95,22.5 56.95,23 ccw(c53.7,23) 53.7,26.25 0.5,26.25 ccw(c0.5,23) -2.75,23 -2.75,0.5 ccw(c0.5,0.5)
GND on Top Layer "TOP_GND_POLY" (solid, remove dead copper, pour order 1): 0.362,-2.747 ccw(c0.4,-2.5) 0.4,-2.75 53.7,-2.75 ccw(c53.7,0.5) 56.95,0.5 56.95,1 ccw(c56.7,1) 56.95,1.001 cw(c58.7,1) 58.7,2.75 61.05,2.75 cw(c61.05,1) 62.8,1 62.8,0.5 cw(c63.05,0.5) 62.8,0.501 62.8,0.5 ccw(c66.05,0.5) 66.05,-2.75 73.75,-2.75 ccw(c73.75,-2.5) 73.751,-2.75 76.75,-2.75 ccw(c76.75,-2.5) 77,-2.5 77,26 ccw(c76.75,26) 76.75,26.25 66.05,26.25 ccw(c66.05,23) 62.8,23 ccw(c63.05,23) 62.8,22.999 62.8,22.5 cw(c61.05,22.5) 61.05,20.75 58.7,20.75 cw(c58.7,22.5) 56.95,22.499 ccw(c56.7,22.5) 56.95,22.5 56.95,23 ccw(c53.7,23) 53.7,26.25 0.5,26.25 ccw(c0.5,23) -2.75,23 -2.75,0.5 ccw(c0.5,0.5)

## Other copper
Top Layer:
  rectangle net NetC7_2: 53.2,13 54.95,14.3
  rectangle net NetC4_2: 27.9,17.6 29.6,20.4
  rectangle net NetC4_1: 26.1,19.4 26.9,21.35
  rectangle net NetC14_1: 12.9,14 14.5,14.8
  rectangle net NetC14_2: 12.9,15.6 14.6,21.3
  pour cut-out: 21.2,8.2 23.9,8.2 24.85,7.25 23,5.4 20.769,5.4
  pour cut-out: 21.2,11.3 23.75,11.3 24.025,11.575 23.5,12.1 22.1,12.1
  region net NetC16_2: 14.1,7.5 14.6,8 15.5,8 15.9,7.6 15.5,7.2 14.4,7.2
  region net NetC19_2: 17.15,8.9 17.95,8.1 19.5,8.1 20.1,7.5 20.1,5.9 16.2,5.9 16.1,6 17.15,7.05
  pour cut-out: 30.77,2.45 29.8,2.45 29,3.25 30.5,4.75 31.25,4.75
  pour cut-out: 13.5,0.8 13.5,3.8 13.55,3.75 15.15,3.75 15.15,0.74
  pour cut-out: 22.2,3.7 22.2,5.9 23,6.7 23.8,5.9 23.8,3.7
  pour cut-out: 11.7,6.7 16.094,6.7 15.1,5.706 15.1,3.7 13.5,3.7 13.5,5.3 11.7,5.3
  pour cut-out: 11.7,11.7 11.7,8.7 13.7,8.7 15.1,10.1 15.1,10.951 14.351,11.7
  pour cut-out: 25.79,2.55 29.7,2.55 27.5,4.75
  pour cut-out: 15.565,20.05 15.565,24.35 18.25,24.35 18.3,24.4 18.3,20.05
  region net NetC7_2: 46.95,13 54.95,13 54.95,12.83 53.42,11.3 46.95,11.3 46.78,11.3 45.25,12.83 45.25,13 45.25,14.2 46.95,14.2
  region net 5V_PREAMP: 40.5,9.5 41,10 43.9,10 49.9,4 55,4 58.5,7.5 63.2,7.5 63.8,6.9 63.8,4.5 62.8,3.5 57.5,3.5 56,2 56,0.5 54.5,-1 47.8,-1 44.5,2.3 44.5,5.75 43.75,6.5 42,6.5 40.5,8
  region net NetR13_2: 16.1,20.7 16.8,20.7 17.2,20.3 17.2,17.2 18.9,17.2 18.9,20.5 18.1,21.3 17.3,21.3
  region net NetC14_1: 15.4,13.1 14.5,14 12.9,14 12.9,13.4 13.5,12.8 15.3,12.8
  pour cut-out: 60.75,13.5 61.25,13 65,13 65,13.25 64.75,13.5
  pour cut-out: 28.1,23.9 28.1,21.9 28.2,21.8 28.6,22.2 28.6,23.8 28.3,24.1
  pour cut-out: 32,16.1 35,16.1 35,19.8 32,19.8

## Silkscreen, mask and mechanical layers (free items; w line width, h text height)
Top Overlay:
  text "rev. 3.0" at 67.25,5.5 h1
  text "MU 2018" at 67.25,3.75 h1
  text "RFPA PREAMP" at 5.75,-2 h1.52
Bottom Overlay:
  rectangle: 12,4 28,17.4
Bottom Solder:
  rectangle: -3,-2 11,27
  rectangle: -3,18.3 30,27
  rectangle: 29,-3 77,27
  rectangle: -3,-3 77,3
Mechanical 1:
  lines w0.5: 0.4,-2.5 53.7,-2.5 ccw(c53.7,0.5) 56.7,0.5 56.7,1 cw(c58.7,1) 58.7,3 61.05,3 cw(c61.05,1) 63.05,1 63.05,0.5 ccw(c66.05,0.5) 66.05,-2.5 73.75,-2.5 76.75,-2.5 76.75,26 73.75,26 66.05,26 ccw(c66.05,23) 63.05,23 63.05,22.5 cw(c61.05,22.5) 61.05,20.5 58.7,20.5 cw(c58.7,22.5) 56.7,22.5 56.7,23 ccw(c53.7,23) 53.7,26 0.5,26 ccw(c0.5,23) -2.5,23 -2.5,0.5 ccw(c0.5,0.5) 0.5,-2.5